# Altium PCB OpenAXESpanel.PcbDoc
Units mm, origin at the board's own origin, x right, y up, seen from the top; angles counter-clockwise.
Board outline 151 x 247.5 mm, 4 copper layers (Top Layer, L2, L3, Bottom Layer), stack 0.956 mm thick; 34 components, 0 nets, 71 pads, 0 vias.
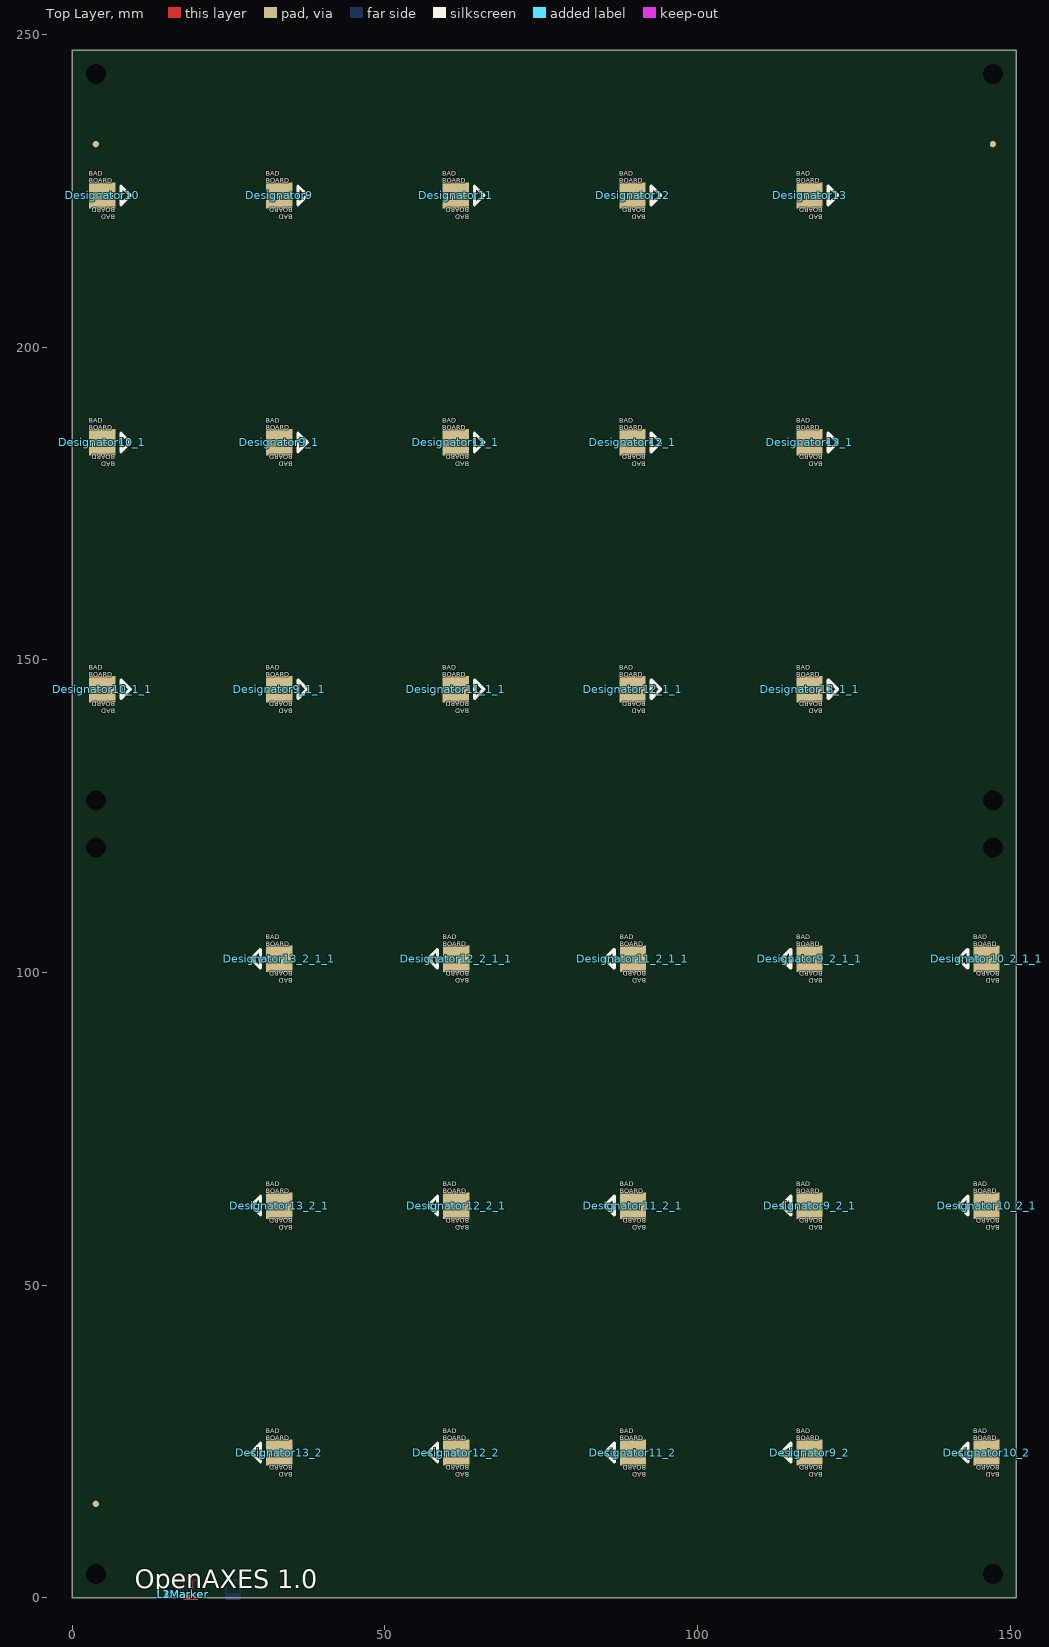
[diagram p0: Top Layer view]
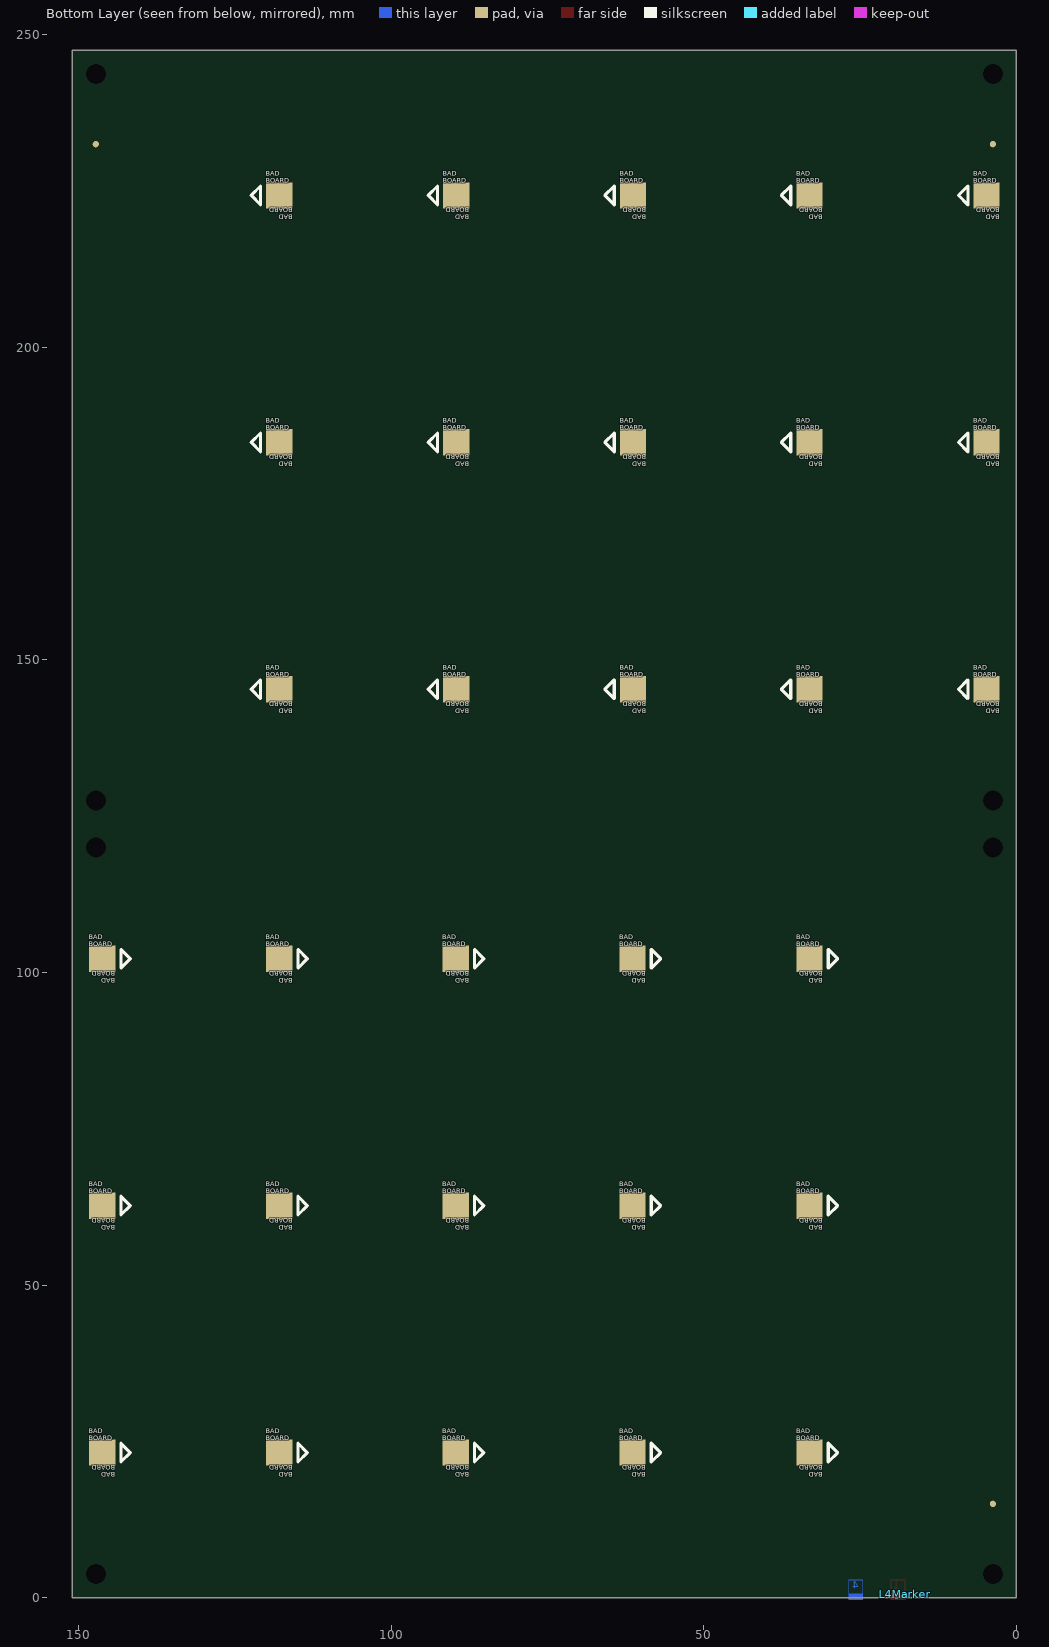
[diagram p1: Bottom Layer view, seen from below]
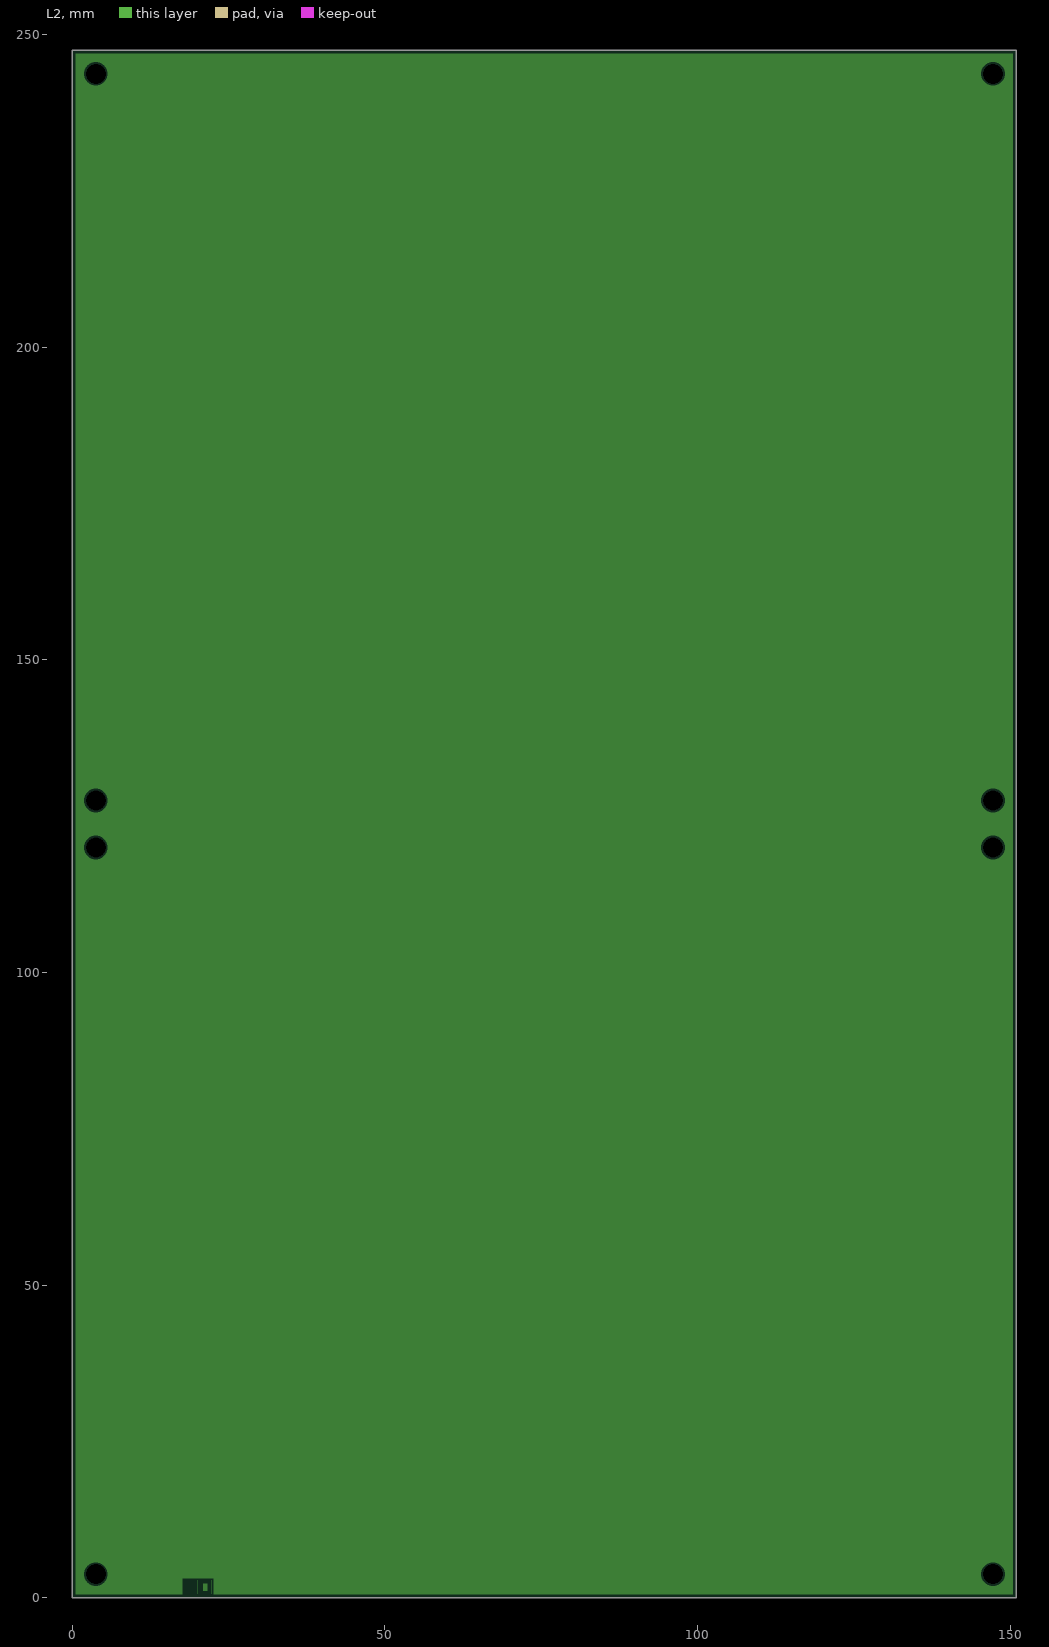
[diagram p2: L2, clearances drawn from the general rule]
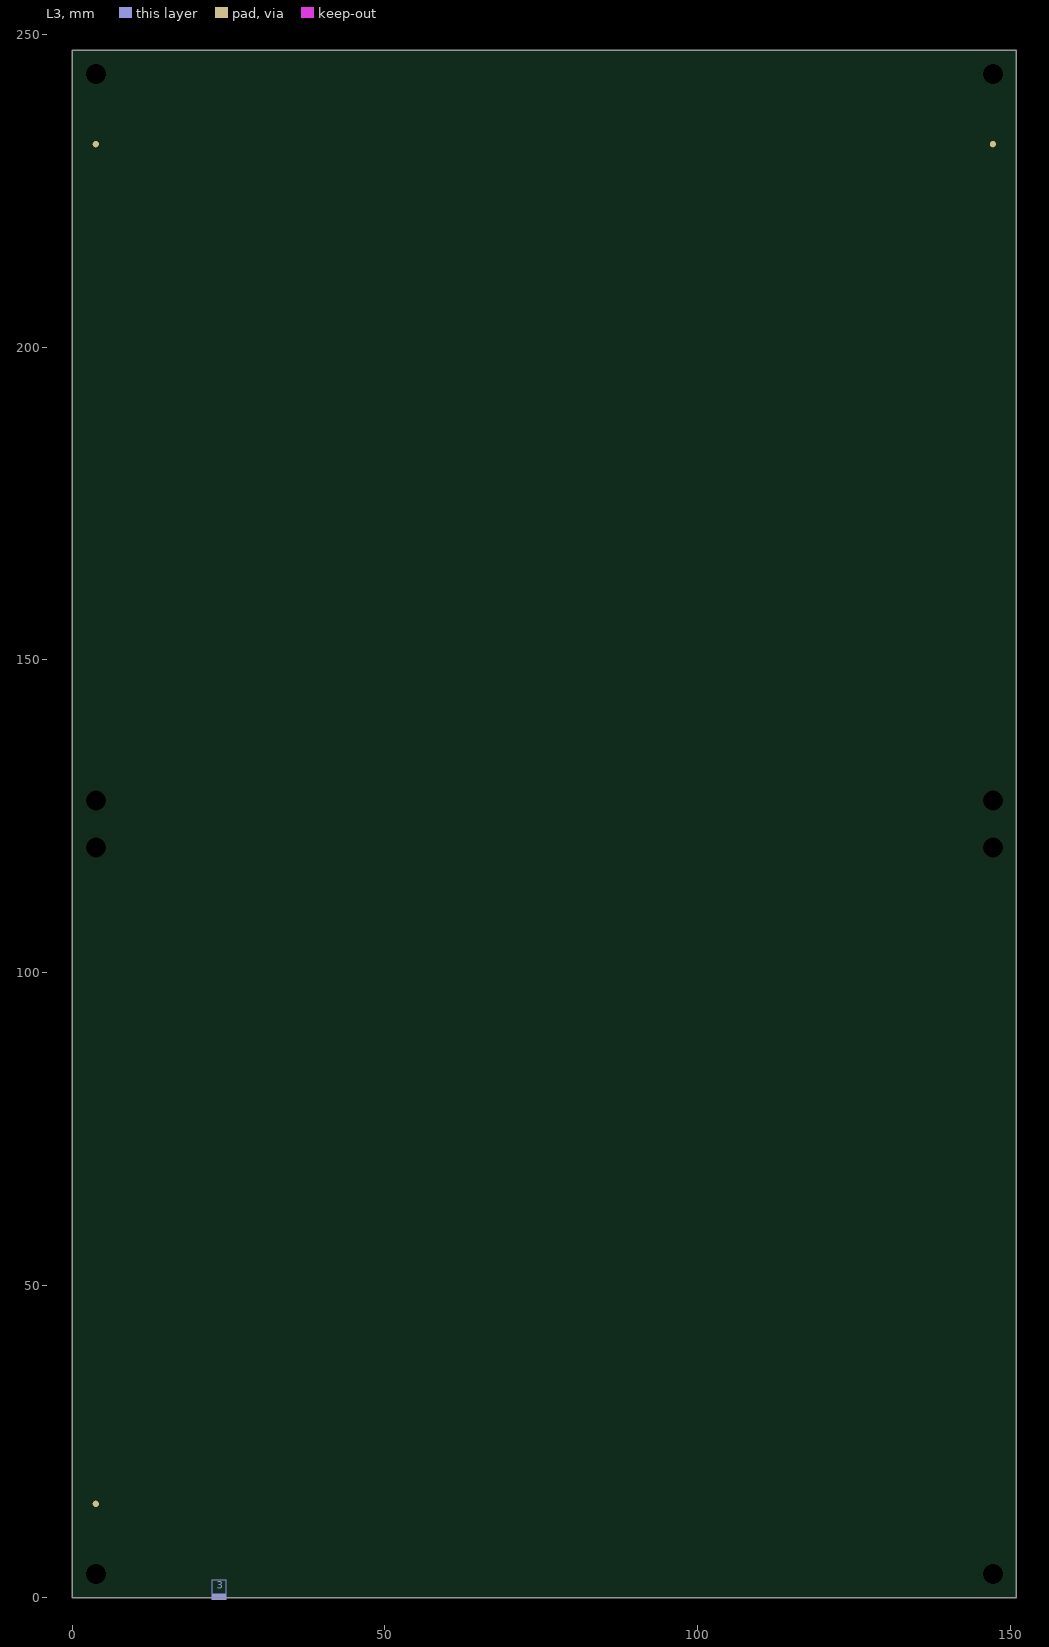
[diagram p3: L3]

## Layer stack, top to bottom
Top Solder: solder mask 0.0102, Solder Resist, Dk 3.5
Top Layer: signal copper 0.035
Dielectric 1: prepreg 0.115, PP-016, Dk 4.4
Dielectric 2: prepreg 0.115, PP-016, Dk 4.4
L2: plane copper 0.035
Dielectric 3: core 0.3556, Core-032, Dk 4.7
L3: signal copper 0.035
Dielectric 4: prepreg 0.115, PP-016, Dk 4.4
Dielectric 5: prepreg 0.115, PP-016, Dk 4.4
Bottom Layer: signal copper 0.035
Bottom Solder: solder mask 0.0102, Solder Resist, Dk 3.5

## Board outline
0,0 0,247.5 151,247.5 151,0

## Design rules (kind name [scope] priority, off if disabled: settings)
BoardOutlineClearance BoardOutlineClearance_ExceptionLayerMarker [TouchesRoom('Room_LayerMarker')] p1: gap=-5 ignorepadtopadclearanceinfootprint=FALSE
BoardOutlineClearance BoardOutlineClearance_Exceptions [InComponent('BAT1') or InComponent('S1')] p2: gap=0.15 ignorepadtopadclearanceinfootprint=FALSE
BoardOutlineClearance [All] p3: gap=0.35 ignorepadtopadclearanceinfootprint=FALSE except(0.254: Text-OutlineEdge Text-CavityEdge Text-CutoutEdge Text-SplitBarrior Text-SplitContinuation)
Clearance Clearance_NPTHoles [(HoleDiameter > 0) AND (PadIsPlated = 'False')] p1: gap=0.3 ignorepadtopadclearanceinfootprint=FALSE
Clearance ClearanceL3Traces [IsTrack and (Layer = 'L3')] p2: gap=0.15 ignorepadtopadclearanceinfootprint=FALSE except(0.3: Arc-THPad Arc-Hole Track-THPad Track-Hole SMDPad-THPad SMDPad-Hole THPad-THPad THPad-Hole Via-Hole Fill-Hole Poly-Hole Region-Hole Text-Hole)
Clearance ClearanceL3Polygons [InNamedPolygon('+3V3_L03_P056') OR InNamedPolygon('+3V3_L03_P046') OR  InNamedPolygon('GND_L03_P060')] p3: gap=0.15 ignorepadtopadclearanceinfootprint=FALSE except(0.3: Arc-Via Arc-Hole Track-Via Track-Hole SMDPad-Via THPad-Via Via-Hole Fill-Hole Poly-Hole Region-Hole)
Clearance [All] p4: gap=0.15 ignorepadtopadclearanceinfootprint=FALSE
Clearance Clearance_ViaSameNet [IsVia AND (not IsComponentPrimitive)] p5: gap=0 ignorepadtopadclearanceinfootprint=TRUE except(0.01: SMDPad-Hole; 0.15: Via-Via)
Clearance Clearance_ShieldingVia [IsShieldingVia] p6: gap=0.15 ignorepadtopadclearanceinfootprint=TRUE
ComponentClearance ComponentClearance_1 [All vs TouchesRoom('Room_LayerMarker')] p1: gap=0.254 collisioncheckmode=3 verticalgap=0 showdistances=FALSE
ComponentClearance [All] p2: gap=0.254 collisioncheckmode=3 verticalgap=0.254 showdistances=FALSE
DiffPairsRouting DiffPairsRoutingUSB [InDifferentialPair('USB_D') or InDifferentialPair('USBD') or InDifferentialPair('D')] p1: maxlimit=0.254 minlimit=0.254 mostfreqgap=0.254 toplayer_minwidth=0.381 toplayer_maxwidth=0.381 toplayer_prefwidth=0.381 midlayer4_minwidth=0.381 midlayer4_maxwidth=0.381 midlayer4_prefwidth=0.381 bottomlayer_minwidth=0.381 bottomlayer_maxwidth=0.381 bottomlayer_prefwidth=0.381 impedanceprofiledriven=TRUE maxuncoupledlength=12.7
HoleSize [All] p1: absolutevalues=TRUE maxlimit=3.2 minlimit=0.2 maxpercent=80.000 minpercent=20.000
MaxMinImpedance [InNetClass('DIFF90')] p1: minimum=81.00 maximum=99.00
MaxMinImpedance "Schematic Impedance Constraint_2" [InNetClass('S50')] p2: minimum=45.00 maximum=55.00
MinimumAnnularRing [((ObjectKind = 'Pad') OR (ObjectKind = 'Via')) And (Layer = 'MultiLayer')] p1: minimumring=0.1
MinimumSolderMaskSliver [All] p1: minsoldermaskwidth=0.1
PlaneClearance [All] p1: clearance=0.3
PlaneConnect [All] p1: planeconnectstyle=Direct reliefexpansion=0.508 reliefentries=4 reliefconductorwidth=0.254 reliefairgap=0.254
PolygonConnect [All] p1: connectstyle=Direct reliefconductorwidth=0.254 reliefentries=4 polygonreliefangle="90 Angle" airgapwidth=0.254
RoutingVias [All] p1: holewidth=0.3 width=0.6 viastyle="Through Hole" minholewidth=0.2 minwidth=0.4 maxholewidth=0.711 maxwidth=1.27 viatemplateguid#1={523A1D89-1D9D-47B3-94C1-C65BE4750151} viatemplatename#1=v320h320
SilkToSilkClearance [All] p1: silktosilkclearance=0
SilkToSolderMaskClearance [IsPad] p1: minsilkscreentomaskgap=0.01 clearancetoexposedcopper=TRUE
SolderMaskExpansion SolderMaskExpansion_1 [IsVia] p1: expansion=-2 istentingtop=FALSE
SolderMaskExpansion [All] p2: expansion=0 istentingtop=FALSE
Width Impedance_50Ohm [InNetClass('S50')] p1: maxlimit=0.939 minlimit=0.321 preferedwidth=0.939 toplayer_maxwidth=0.321 toplayer_prefwidth=0.321 midlayer4_minwidth=0.52 midlayer4_maxwidth=0.52 midlayer4_prefwidth=0.52 bottomlayer_minwidth=0.939 impedanceprofiledriven=TRUE minimp=50.000000 maximp=50.000000 favimp=50.000000
Width "Schematic Width Constraint_3" [InNet('+5V')] p2: maxlimit=0.5 minlimit=0.254 preferedwidth=0.254
Width "Schematic Width Constraint_2" [InNet('USB_V+')] p3: maxlimit=0.5 minlimit=0.254 preferedwidth=0.254
Width [All] p4: maxlimit=5 minlimit=0.15 preferedwidth=0.254
22 further rules are at their usual default settings.

## Components (designator, comment, footprint, x,y, rotation, side; value= is the part's Value field where it differs from the comment)
Designator9 "Comment" BADBOARDMARKER 33.088,224.3 r0 top
Designator9_1 "Comment" BADBOARDMARKER 33.088,184.8 r0 top
Designator9_1_1 "Comment" BADBOARDMARKER 33.088,145.3 r0 top
Designator9_2 "Comment" BADBOARDMARKER 117.912,23.2 r180 top
Designator9_2_1 "Comment" BADBOARDMARKER 117.912,62.7 r180 top
Designator9_2_1_1 "Comment" BADBOARDMARKER 117.912,102.2 r180 top
Designator10 "Comment" BADBOARDMARKER 4.763,224.3 r0 top
Designator10_1 "Comment" BADBOARDMARKER 4.763,184.8 r0 top
Designator10_1_1 "Comment" BADBOARDMARKER 4.763,145.3 r0 top
Designator10_2 "Comment" BADBOARDMARKER 146.237,23.2 r180 top
Designator10_2_1 "Comment" BADBOARDMARKER 146.237,62.7 r180 top
Designator10_2_1_1 "Comment" BADBOARDMARKER 146.237,102.2 r180 top
Designator11 "Comment" BADBOARDMARKER 61.327,224.3 r0 top
Designator11_1 "Comment" BADBOARDMARKER 61.327,184.8 r0 top
Designator11_1_1 "Comment" BADBOARDMARKER 61.327,145.3 r0 top
Designator11_2 "Comment" BADBOARDMARKER 89.673,23.2 r180 top
Designator11_2_1 "Comment" BADBOARDMARKER 89.673,62.7 r180 top
Designator11_2_1_1 "Comment" BADBOARDMARKER 89.673,102.2 r180 top
Designator12 "Comment" BADBOARDMARKER 89.602,224.3 r0 top
Designator12_1 "Comment" BADBOARDMARKER 89.602,184.8 r0 top
Designator12_1_1 "Comment" BADBOARDMARKER 89.602,145.3 r0 top
Designator12_2 "Comment" BADBOARDMARKER 61.398,23.2 r180 top
Designator12_2_1 "Comment" BADBOARDMARKER 61.398,62.7 r180 top
Designator12_2_1_1 "Comment" BADBOARDMARKER 61.398,102.2 r180 top
Designator13 "Comment" BADBOARDMARKER 117.913,224.3 r0 top
Designator13_1 "Comment" BADBOARDMARKER 117.913,184.8 r0 top
Designator13_1_1 "Comment" BADBOARDMARKER 117.913,145.3 r0 top
Designator13_2 "Comment" BADBOARDMARKER 33.087,23.2 r180 top
Designator13_2_1 "Comment" BADBOARDMARKER 33.087,62.7 r180 top
Designator13_2_1_1 "Comment" BADBOARDMARKER 33.087,102.2 r180 top
L1Marker "" SIGNAL-1 17.75,0.5 r0 top
L2Marker "" PLANE-2 17.75,0.5 r0 top
L3Marker "" SIGNAL-3 17.75,0.5 r0 top
L4Marker "" SIGNAL-4 17.75,0.5 r0 bottom

## Footprints (in the part's own frame and the unit in brackets; to place one, negate y for a bottom-side part, rotate by r counter-clockwise, add the part's x,y. Pads: shape width x height; smd on the part's side, far side on the other; paste and mask are expansions set on the pad)
BADBOARDMARKER [mm]
  rect 4.2x4.2 smd far side paste-5: BOT(0,0)
  rect 4.2x4.2 smd paste-5: TOP(0,0)
  silkscreen extent 3,-1.5 4.5,1.5
PLANE-2 [mm]
  L2 region: -0.125,-0.125 2.25,-0.125 2.25,2.5 -0.125,2.5
  L2 region: 2.375,0.125 3.103,0.125 3.103,2.25 2.375,2.25
  L2 region: 4.5,1.83 4.5,2.25 2.375,2.25 2.375,1.83
  L2 region: 4.5,2.25 3.923,2.25 3.923,0.125 4.5,0.125
  L2 region: 2.375,0.552 2.375,0.125 4.5,0.125 4.5,0.552
  L2 region: 4.75,-0.125 4.75,0 2.125,0 2.125,-0.125
  L2 region: 4.625,-0.125 4.75,-0.125 4.75,2.5 4.625,2.5
  L2 region: 4.75,2.375 4.75,2.5 2.125,2.5 2.125,2.375
  L2 region: 2.375,0.125 3.103,0.125 3.103,2.25 2.375,2.25
  L2 region: 4.5,1.83 4.5,2.25 2.375,2.25 2.375,1.83
  L2 region: 4.5,2.25 3.923,2.25 3.923,0.125 4.5,0.125
  L2 region: 2.375,0.552 2.375,0.125 4.5,0.125 4.5,0.552
  L2 region: 2.125,-0.125 2.25,-0.125 2.25,2.5 2.125,2.5
  L2 region: 4.75,-0.125 4.75,0 2.125,0 2.125,-0.125
SIGNAL-1 [mm]
  Top Layer region: 2.25,0 2.375,0 2.375,2.375 2.25,2.375
  Top Layer region: 0,0.125 0,-0.889 2.375,-0.889 2.375,0.125
  Top Layer region: 2.375,2.375 2.25,2.375 2.25,0 2.375,0
  Top Layer region: 2.375,2.25 2.375,2.375 0,2.375 0,2.25
  Top Layer region: 0,0 0.125,0 0.125,2.375 0,2.375
  Top Layer pour cut-out: -0.125,2.5 -0.125,-0.125 2.5,-0.125 2.5,2.5
SIGNAL-3 [mm]
  L3 region: 4.625,2.375 4.5,2.375 4.5,0 4.625,0
  L3 region: 4.5,0.125 4.5,-0.889 6.875,-0.889 6.875,0.125
  L3 region: 6.875,2.375 6.75,2.375 6.75,0 6.875,0
  L3 region: 6.875,2.25 6.875,2.375 4.5,2.375 4.5,2.25
  L3 region: 6.75,0 6.875,0 6.875,2.375 6.75,2.375
  L3 pour cut-out: -0.125,2.5 -0.125,-0.125 7,-0.125 7,2.5
SIGNAL-4 [mm]
  Top Layer region: 6.875,-2.375 6.75,-2.375 6.75,0 6.875,0
  Top Layer region: 6.75,-0.125 6.75,0.889 9.125,0.889 9.125,-0.125
  Top Layer region: 9.125,-2.375 9,-2.375 9,0 9.125,0
  Top Layer region: 9.125,-2.25 9.125,-2.375 6.75,-2.375 6.75,-2.25
  Top Layer region: 9,0 9.125,0 9.125,-2.375 9,-2.375
  Top Layer pour cut-out: -0.125,-2.5 -0.125,0.125 9.25,0.125 9.25,-2.5

## Free pads (board coordinates)
  round 1 all layers, no hole mask+1: FIDUCIAL(3.75,15) FIDUCIAL(3.75,232.5) FIDUCIAL(147.25,232.5)
  round 0 hole 3.2 unplated mask+0: "TOOLING HOLE"(3.75,3.75) "TOOLING HOLE"(3.75,120) "TOOLING HOLE"(3.75,127.5) "TOOLING HOLE"(3.75,243.75) "TOOLING HOLE"(147.25,3.75) "TOOLING HOLE"(147.25,120) "TOOLING HOLE"(147.25,127.5) "TOOLING HOLE"(147.25,243.75)

## Nets (pads, with @x,y where several pads share a name; then routed paths per layer and width w, separated by ;. In a path a pad name is that pad's centre, name@x,y a point inside that pad or via, vN(x,y) a via of type N, cw(c..) or ccw(c..) an arc to the next point about the centre after c; other vN are vias at no path point)
pads on no net: Designator9.BOT Designator9.TOP Designator9_1.BOT Designator9_1.TOP Designator9_1_1.BOT Designator9_1_1.TOP Designator9_2.BOT Designator9_2.TOP Designator9_2_1.BOT Designator9_2_1.TOP Designator9_2_1_1.BOT Designator9_2_1_1.TOP Designator10.BOT Designator10.TOP Designator10_1.BOT Designator10_1.TOP Designator10_1_1.BOT Designator10_1_1.TOP Designator10_2.BOT Designator10_2.TOP Designator10_2_1.BOT Designator10_2_1.TOP Designator10_2_1_1.BOT Designator10_2_1_1.TOP Designator11.BOT Designator11.TOP Designator11_1.BOT Designator11_1.TOP Designator11_1_1.BOT Designator11_1_1.TOP Designator11_2.BOT Designator11_2.TOP Designator11_2_1.BOT Designator11_2_1.TOP Designator11_2_1_1.BOT Designator11_2_1_1.TOP Designator12.BOT Designator12.TOP Designator12_1.BOT Designator12_1.TOP Designator12_1_1.BOT Designator12_1_1.TOP Designator12_2.BOT Designator12_2.TOP Designator12_2_1.BOT Designator12_2_1.TOP Designator12_2_1_1.BOT Designator12_2_1_1.TOP Designator13.BOT Designator13.TOP Designator13_1.BOT Designator13_1.TOP Designator13_1_1.BOT Designator13_1_1.TOP Designator13_2.BOT Designator13_2.TOP Designator13_2_1.BOT Designator13_2_1.TOP Designator13_2_1_1.BOT Designator13_2_1_1.TOP

## Polygon pours and split planes (outlines as drawn)
no net on L2 (split plane): 150.49,0.51 22.5,0.51 22.5,3 22.375,3 20,3 19.875,3 17.625,3 17.625,0.51 0.51,0.51 0.51,246.99 150.49,246.99
no net on L2 (split plane): 22.375,0.51 20,0.51 20,2.875 22.375,2.875
no net on L2 (split plane): 21.673,1.052 21.672,1.052 21.672,2.33 21.673,2.33

## Silkscreen, mask and mechanical layers (free items; w line width, h text height)
Top Overlay:
  text "OpenAXES 1.0" at 9.95,1.5 h3
V Cut:
  lines w0: 0,44.75 151,44.75 ; 0,84.25 151,84.25 ; 0,123.75 151,123.75 ; 0,163.25 151,163.25 ; 0,202.75 151,202.75 ; 9.95,0 9.95,247.5 ; 27.95,0 27.95,247.5 ; 38.225,0 38.225,247.5 ; 56.225,0 56.225,247.5 ; 66.5,0 66.5,247.5 ; 84.5,0 84.5,247.5 ; 94.775,0 94.775,247.5 ; 112.775,0 112.775,247.5 ; 123.05,0 123.05,247.5 ; 141.05,0 141.05,247.5
  text "V-GROOVE 30° / REMAINING BRIDGE THICKNESS: 0.3mm" at 9.95,247.5 h1.5 r90
  text "V-GROOVE 30° / REMAINING BRIDGE THICKNESS: 0.3mm" at 27.95,247.5 h1.5 r90
  text "V-GROOVE 30° / REMAINING BRIDGE THICKNESS: 0.3mm" at 38.225,247.5 h1.5 r90
  text "V-GROOVE 30° / REMAINING BRIDGE THICKNESS: 0.3mm" at 56.225,247.5 h1.5 r90
  text "V-GROOVE 30° / REMAINING BRIDGE THICKNESS: 0.3mm" at 66.5,247.5 h1.5 r90
  text "V-GROOVE 30° / REMAINING BRIDGE THICKNESS: 0.3mm" at 84.5,247.5 h1.5 r90
  text "V-GROOVE 30° / REMAINING BRIDGE THICKNESS: 0.3mm" at 94.775,247.5 h1.5 r90
  text "V-GROOVE 30° / REMAINING BRIDGE THICKNESS: 0.3mm" at 112.775,247.5 h1.5 r90
  text "V-GROOVE 30° / REMAINING BRIDGE THICKNESS: 0.3mm" at 123.05,247.5 h1.5 r90
  text "V-GROOVE 30° / REMAINING BRIDGE THICKNESS: 0.3mm" at 141.05,247.5 h1.5 r90
  text "V-GROOVE 30° / REMAINING BRIDGE THICKNESS: 0.3mm" at 151,202.75 h1.5
  text "V-GROOVE 30° / REMAINING BRIDGE THICKNESS: 0.3mm" at 151,163.25 h1.5
  text "V-GROOVE 30° / REMAINING BRIDGE THICKNESS: 0.3mm" at 151,123.75 h1.5
  text "V-GROOVE 30° / REMAINING BRIDGE THICKNESS: 0.3mm" at 151,84.25 h1.5
  text "V-GROOVE 30° / REMAINING BRIDGE THICKNESS: 0.3mm" at 151,44.75 h1.5
Board:
  the board outline again, w0
Fab Notes:
  drawing of 347 lines, arcs and shapes, not listed
  text "Layer" at 1.968,328.777 h1.52
  text "Name" at 12.38,328.777 h1.52
  text "Material" at 35.996,328.777 h1.52
  text "Thickness" at 57.834,328.777 h1.52
  text "Constant" at 74.34,328.777 h1.52
  text "Board Layer Stack" at 88.814,328.777 h1.52
  text "Top Overlay" at 12.38,325.729 h1.52
  text "Top Solder" at 12.38,322.681 h1.52
  text "Solder Resist" at 35.996,322.681 h1.52
  text "0,010mm" at 57.834,322.681 h1.52
  text "3.5" at 74.34,322.681 h1.52
  text "1" at 1.968,319.633 h1.52
  text "Top Layer" at 12.38,319.633 h1.52
  text "0,035mm" at 57.834,319.633 h1.52
  text "Dielectric 1" at 12.38,316.585 h1.52
  text "PP-016" at 35.996,316.585 h1.52
  text "0,115mm" at 57.834,316.585 h1.52
  text "4.4" at 74.34,316.585 h1.52
  text "Dielectric 2" at 12.38,313.537 h1.52
  text "PP-016" at 35.996,313.537 h1.52
  text "0,115mm" at 57.834,313.537 h1.52
  text "4.4" at 74.34,313.537 h1.52
  text "2" at 1.968,310.489 h1.52
  text "L2" at 12.38,310.489 h1.52
  text "0,035mm" at 57.834,310.489 h1.52
  text "Dielectric 3" at 12.38,307.441 h1.52
  text "Core-032" at 35.996,307.441 h1.52
  text "0,356mm" at 57.834,307.441 h1.52
  text "4.7" at 74.34,307.441 h1.52
  text "3" at 1.968,304.393 h1.52
  text "L3" at 12.38,304.393 h1.52
  text "0,035mm" at 57.834,304.393 h1.52
  text "Dielectric 4" at 12.38,301.345 h1.52
  text "PP-016" at 35.996,301.345 h1.52
  text "0,115mm" at 57.834,301.345 h1.52
  text "4.4" at 74.34,301.345 h1.52
  text "Dielectric 5" at 12.38,298.297 h1.52
  text "PP-016" at 35.996,298.297 h1.52
  text "0,115mm" at 57.834,298.297 h1.52
  text "4.4" at 74.34,298.297 h1.52
  text "4" at 1.968,295.249 h1.52
  text "Bottom Layer" at 12.38,295.249 h1.52
  text "0,035mm" at 57.834,295.249 h1.52
  text "Bottom Solder" at 12.38,292.201 h1.52
  text "Solder Resist" at 35.996,292.201 h1.52
  text "0,010mm" at 57.834,292.201 h1.52
  text "3.5" at 74.34,292.201 h1.52
  text "Bottom Overlay" at 12.38,289.153 h1.52

## Dimensions
0,0 to 0,247.5 on Dimensions
0,0 to 151,0 on Dimensions

## Panel: embedded boards
"OpenAXES.PcbDoc" at 141.05,10.25, 5 rows x 3 columns, spacing 28.275 x 39.5, rotation 90
"OpenAXES.PcbDoc" at 9.95,237.25, 5 rows x 3 columns, spacing 28.275 x 39.5, rotation 270

## Text inside footprints (layer, text, board x,y; h text height)
Designator9: Bottom Overlay "BAD / BOARD" at 30.963,222.3 h0.75 r180; Bottom Overlay "BAD / BOARD" at 35.213,226.3 h0.75; Top Overlay "BAD / BOARD" at 30.963,226.3 h0.75; Top Overlay "BAD / BOARD" at 35.213,222.3 h0.75 r180
Designator9_1: Bottom Overlay "BAD / BOARD" at 30.963,182.8 h0.75 r180; Bottom Overlay "BAD / BOARD" at 35.213,186.8 h0.75; Top Overlay "BAD / BOARD" at 35.213,182.8 h0.75 r180; Top Overlay "BAD / BOARD" at 30.963,186.8 h0.75
Designator9_1_1: Bottom Overlay "BAD / BOARD" at 30.963,143.3 h0.75 r180; Bottom Overlay "BAD / BOARD" at 35.213,147.3 h0.75; Top Overlay "BAD / BOARD" at 35.213,143.3 h0.75 r180; Top Overlay "BAD / BOARD" at 30.963,147.3 h0.75
Designator9_2: Bottom Overlay "BAD / BOARD" at 120.037,25.2 h0.75; Bottom Overlay "BAD / BOARD" at 115.788,21.2 h0.75 r180; Top Overlay "BAD / BOARD" at 120.037,21.2 h0.75 r180; Top Overlay "BAD / BOARD" at 115.788,25.2 h0.75
Designator9_2_1: Bottom Overlay "BAD / BOARD" at 115.788,60.7 h0.75 r180; Bottom Overlay "BAD / BOARD" at 120.037,64.7 h0.75; Top Overlay "BAD / BOARD" at 115.788,64.7 h0.75; Top Overlay "BAD / BOARD" at 120.037,60.7 h0.75 r180
Designator9_2_1_1: Bottom Overlay "BAD / BOARD" at 120.037,104.2 h0.75; Bottom Overlay "BAD / BOARD" at 115.788,100.2 h0.75 r180; Top Overlay "BAD / BOARD" at 115.788,104.2 h0.75; Top Overlay "BAD / BOARD" at 120.037,100.2 h0.75 r180
Designator10: Bottom Overlay "BAD / BOARD" at 6.888,226.3 h0.75; Bottom Overlay "BAD / BOARD" at 2.638,222.3 h0.75 r180; Top Overlay "BAD / BOARD" at 2.638,226.3 h0.75; Top Overlay "BAD / BOARD" at 6.888,222.3 h0.75 r180
Designator10_1: Bottom Overlay "BAD / BOARD" at 2.638,182.8 h0.75 r180; Bottom Overlay "BAD / BOARD" at 6.888,186.8 h0.75; Top Overlay "BAD / BOARD" at 2.638,186.8 h0.75; Top Overlay "BAD / BOARD" at 6.888,182.8 h0.75 r180
Designator10_1_1: Bottom Overlay "BAD / BOARD" at 6.888,147.3 h0.75; Bottom Overlay "BAD / BOARD" at 2.638,143.3 h0.75 r180; Top Overlay "BAD / BOARD" at 6.888,143.3 h0.75 r180; Top Overlay "BAD / BOARD" at 2.638,147.3 h0.75
Designator10_2: Bottom Overlay "BAD / BOARD" at 144.112,21.2 h0.75 r180; Bottom Overlay "BAD / BOARD" at 148.362,25.2 h0.75; Top Overlay "BAD / BOARD" at 148.362,21.2 h0.75 r180; Top Overlay "BAD / BOARD" at 144.112,25.2 h0.75
Designator10_2_1: Bottom Overlay "BAD / BOARD" at 144.112,60.7 h0.75 r180; Bottom Overlay "BAD / BOARD" at 148.362,64.7 h0.75; Top Overlay "BAD / BOARD" at 144.112,64.7 h0.75; Top Overlay "BAD / BOARD" at 148.362,60.7 h0.75 r180
Designator10_2_1_1: Bottom Overlay "BAD / BOARD" at 144.112,100.2 h0.75 r180; Bottom Overlay "BAD / BOARD" at 148.362,104.2 h0.75; Top Overlay "BAD / BOARD" at 148.362,100.2 h0.75 r180; Top Overlay "BAD / BOARD" at 144.112,104.2 h0.75
Designator11: Bottom Overlay "BAD / BOARD" at 63.452,226.3 h0.75; Bottom Overlay "BAD / BOARD" at 59.202,222.3 h0.75 r180; Top Overlay "BAD / BOARD" at 59.202,226.3 h0.75; Top Overlay "BAD / BOARD" at 63.452,222.3 h0.75 r180
Designator11_1: Bottom Overlay "BAD / BOARD" at 63.452,186.8 h0.75; Bottom Overlay "BAD / BOARD" at 59.202,182.8 h0.75 r180; Top Overlay "BAD / BOARD" at 63.452,182.8 h0.75 r180; Top Overlay "BAD / BOARD" at 59.202,186.8 h0.75
Designator11_1_1: Bottom Overlay "BAD / BOARD" at 63.452,147.3 h0.75; Bottom Overlay "BAD / BOARD" at 59.202,143.3 h0.75 r180; Top Overlay "BAD / BOARD" at 59.202,147.3 h0.75; Top Overlay "BAD / BOARD" at 63.452,143.3 h0.75 r180
Designator11_2: Bottom Overlay "BAD / BOARD" at 91.798,25.2 h0.75; Bottom Overlay "BAD / BOARD" at 87.548,21.2 h0.75 r180; Top Overlay "BAD / BOARD" at 91.798,21.2 h0.75 r180; Top Overlay "BAD / BOARD" at 87.548,25.2 h0.75
Designator11_2_1: Bottom Overlay "BAD / BOARD" at 91.798,64.7 h0.75; Bottom Overlay "BAD / BOARD" at 87.548,60.7 h0.75 r180; Top Overlay "BAD / BOARD" at 91.798,60.7 h0.75 r180; Top Overlay "BAD / BOARD" at 87.548,64.7 h0.75
Designator11_2_1_1: Bottom Overlay "BAD / BOARD" at 87.548,100.2 h0.75 r180; Bottom Overlay "BAD / BOARD" at 91.798,104.2 h0.75; Top Overlay "BAD / BOARD" at 91.798,100.2 h0.75 r180; Top Overlay "BAD / BOARD" at 87.548,104.2 h0.75
Designator12: Bottom Overlay "BAD / BOARD" at 87.477,222.3 h0.75 r180; Bottom Overlay "BAD / BOARD" at 91.727,226.3 h0.75; Top Overlay "BAD / BOARD" at 87.477,226.3 h0.75; Top Overlay "BAD / BOARD" at 91.727,222.3 h0.75 r180
Designator12_1: Bottom Overlay "BAD / BOARD" at 91.727,186.8 h0.75; Bottom Overlay "BAD / BOARD" at 87.477,182.8 h0.75 r180; Top Overlay "BAD / BOARD" at 87.477,186.8 h0.75; Top Overlay "BAD / BOARD" at 91.727,182.8 h0.75 r180
Designator12_1_1: Bottom Overlay "BAD / BOARD" at 91.727,147.3 h0.75; Bottom Overlay "BAD / BOARD" at 87.477,143.3 h0.75 r180; Top Overlay "BAD / BOARD" at 87.477,147.3 h0.75; Top Overlay "BAD / BOARD" at 91.727,143.3 h0.75 r180
Designator12_2: Bottom Overlay "BAD / BOARD" at 63.523,25.2 h0.75; Bottom Overlay "BAD / BOARD" at 59.273,21.2 h0.75 r180; Top Overlay "BAD / BOARD" at 59.273,25.2 h0.75; Top Overlay "BAD / BOARD" at 63.523,21.2 h0.75 r180
Designator12_2_1: Bottom Overlay "BAD / BOARD" at 59.273,60.7 h0.75 r180; Bottom Overlay "BAD / BOARD" at 63.523,64.7 h0.75; Top Overlay "BAD / BOARD" at 63.523,60.7 h0.75 r180; Top Overlay "BAD / BOARD" at 59.273,64.7 h0.75
Designator12_2_1_1: Bottom Overlay "BAD / BOARD" at 63.523,104.2 h0.75; Bottom Overlay "BAD / BOARD" at 59.273,100.2 h0.75 r180; Top Overlay "BAD / BOARD" at 63.523,100.2 h0.75 r180; Top Overlay "BAD / BOARD" at 59.273,104.2 h0.75
Designator13: Bottom Overlay "BAD / BOARD" at 115.788,222.3 h0.75 r180; Bottom Overlay "BAD / BOARD" at 120.038,226.3 h0.75; Top Overlay "BAD / BOARD" at 120.038,222.3 h0.75 r180; Top Overlay "BAD / BOARD" at 115.788,226.3 h0.75
Designator13_1: Bottom Overlay "BAD / BOARD" at 115.788,182.8 h0.75 r180; Bottom Overlay "BAD / BOARD" at 120.038,186.8 h0.75; Top Overlay "BAD / BOARD" at 115.788,186.8 h0.75; Top Overlay "BAD / BOARD" at 120.038,182.8 h0.75 r180
Designator13_1_1: Bottom Overlay "BAD / BOARD" at 115.788,143.3 h0.75 r180; Bottom Overlay "BAD / BOARD" at 120.038,147.3 h0.75; Top Overlay "BAD / BOARD" at 115.788,147.3 h0.75; Top Overlay "BAD / BOARD" at 120.038,143.3 h0.75 r180
Designator13_2: Bottom Overlay "BAD / BOARD" at 30.962,21.2 h0.75 r180; Bottom Overlay "BAD / BOARD" at 35.212,25.2 h0.75; Top Overlay "BAD / BOARD" at 35.212,21.2 h0.75 r180; Top Overlay "BAD / BOARD" at 30.962,25.2 h0.75
Designator13_2_1: Bottom Overlay "BAD / BOARD" at 35.212,64.7 h0.75; Bottom Overlay "BAD / BOARD" at 30.962,60.7 h0.75 r180; Top Overlay "BAD / BOARD" at 35.212,60.7 h0.75 r180; Top Overlay "BAD / BOARD" at 30.962,64.7 h0.75
Designator13_2_1_1: Bottom Overlay "BAD / BOARD" at 30.962,100.2 h0.75 r180; Bottom Overlay "BAD / BOARD" at 35.212,104.2 h0.75; Top Overlay "BAD / BOARD" at 30.962,104.2 h0.75; Top Overlay "BAD / BOARD" at 35.212,100.2 h0.75 r180
L1Marker: Top Layer "1" at 18.675,1.05 h2
L2Marker: L2 "2" at 20.825,1.05 h2; L2 "2" at 20.825,1.05 h2
L3Marker: L3 "3" at 23.084,1.05 h2
L4Marker: Bottom Layer "4" at 25.243,1.05 h2